# Altium PCB [BB]PowerSuppyandMotorDriver_REV1.0.PcbDoc
Units mm, origin at the board's own origin, x right, y up, seen from the top; angles counter-clockwise.
Board outline 293.07 x 144.6 mm, 2 copper layers (Top Layer, Bottom Layer); 93 components, 73 nets, 292 pads, 7 vias.
Unrouted connection lines stored in the file: 209.
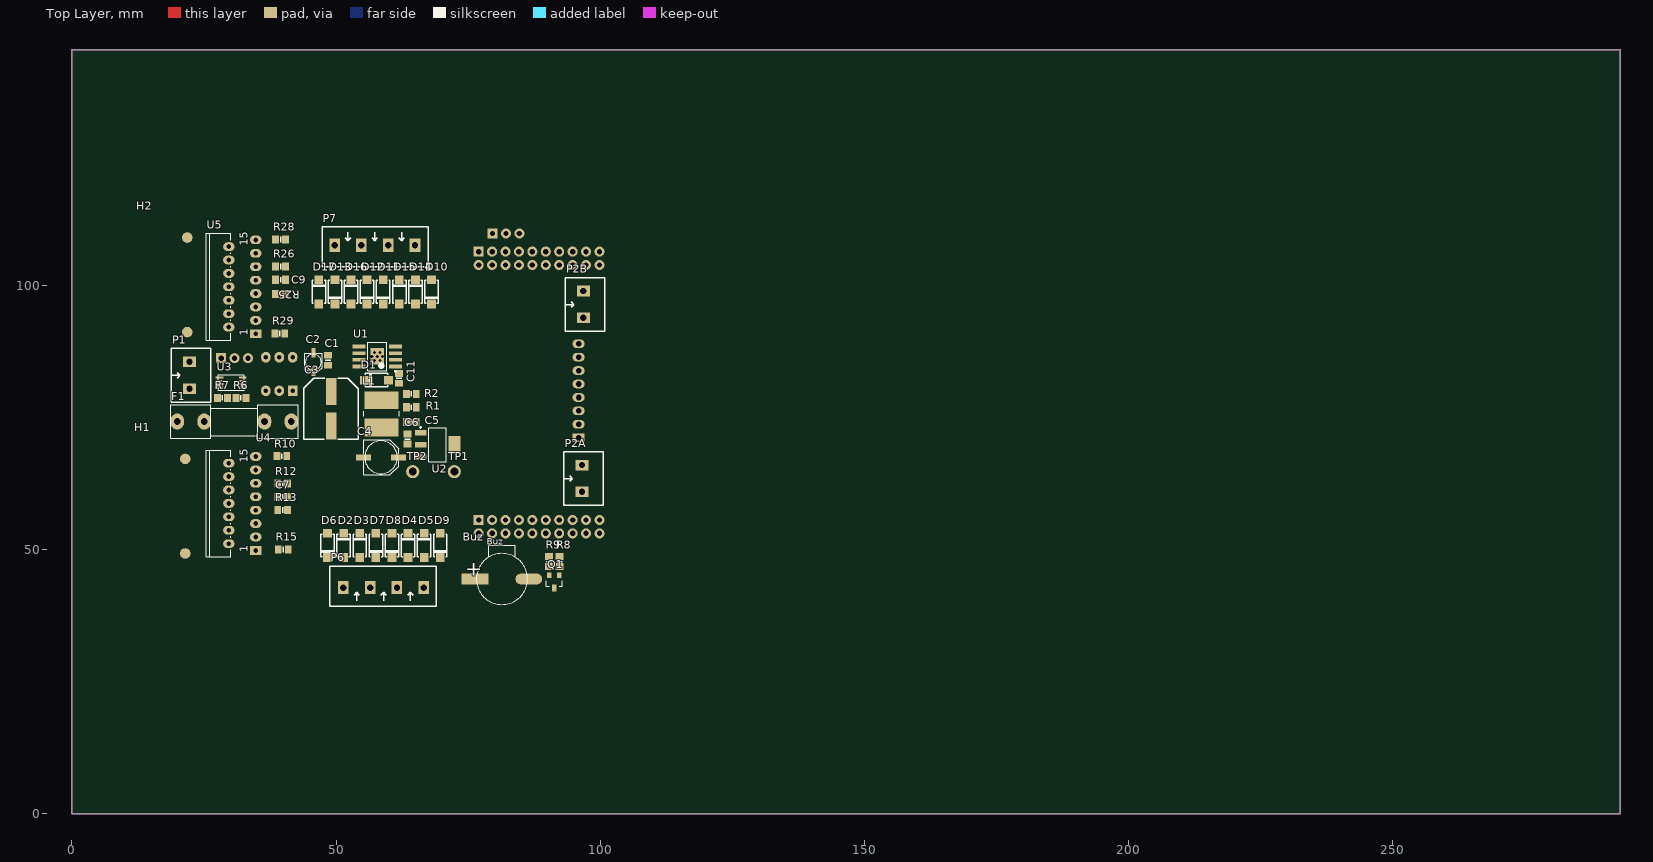
[diagram p0: Top Layer view]
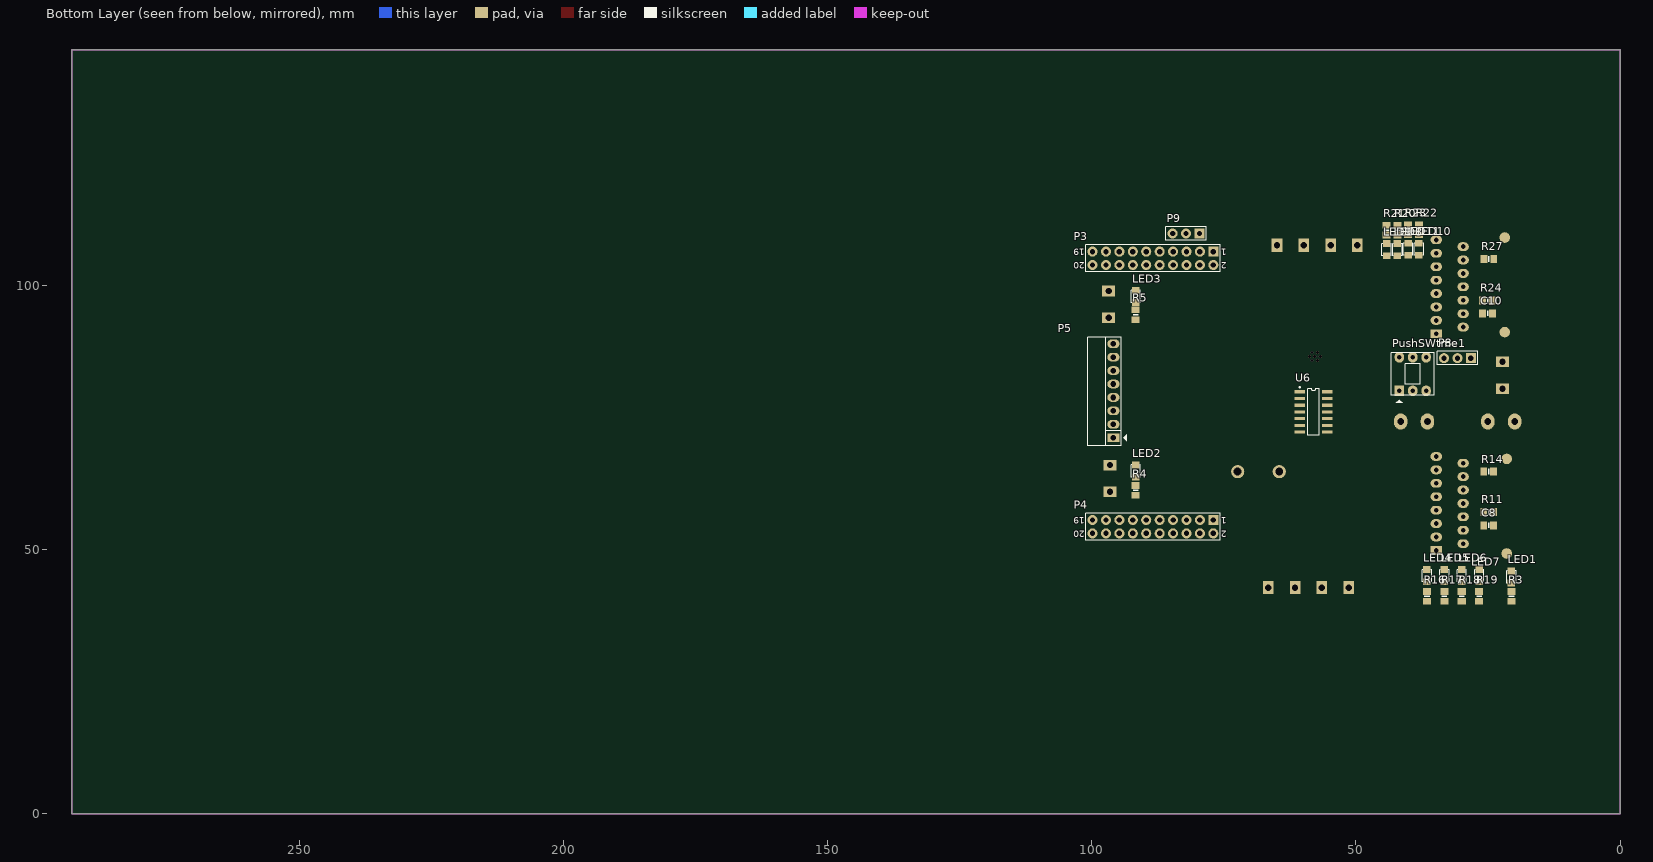
[diagram p1: Bottom Layer view, seen from below]

## Layer stack, top to bottom
Top Solder: solder mask 0.0102, Solder Resist, Dk 3.5
Top Layer: signal copper 0.0356
Dielectric 1: dielectric 0.32, FR-4, Dk 4.8
Bottom Layer: signal copper 0.0356
Bottom Solder: solder mask 0.0102, Solder Resist, Dk 3.5

## Board outline
0,0 293.065,0 293.065,144.602 0,144.602

## Design rules (kind name [scope] priority, off if disabled: settings)
Clearance [All] p1: gap=0.254
PolygonConnect [All] p1: connectstyle=Relief reliefconductorwidth=0.254 reliefentries=4 polygonreliefangle="90 Angle" airgapwidth=0.254
RoutingVias [All] p1: holewidth=0.711 width=1.27 viastyle="Through Hole" minholewidth=0.711 minwidth=1.27 maxholewidth=0.711 maxwidth=1.27
SolderMaskExpansion [All] p1: expansion=0.102
Width [All] p1: maxlimit=0.254 minlimit=0.254 preferedwidth=0.254
30 further rules are at their usual default settings.

## Components (designator, comment, footprint, x,y, rotation, side; value= is the part's Value field where it differs from the comment)
Buz "Buzzer" "BUZZER SMD" 78.867,44.45 r0 top
C1 "100nF-10%" C0805 48.463,85.852 r270 top
C2 "3.3µF" SM/C_ALU_SA 45.695,83.718 r90 top
C3 "330uF/35V" "Size G" 49.098,79.908 r270 top
C4 "220uF-6.3V" SM/C_ALU_SD8 61.824,67.488 r180 top
C5 "100nF-10%" C0805 64.262,74.168 r180 top
C6 "100nF-10%" C0805 63.525,70.942 r270 top
C7 "100nF-10%" C0805 39.878,59.944 r0 top
C8 "100nF-10%" C0805 24.892,54.61 r0 bottom
C9 "100nF-10%" C0805 39.497,101.092 r0 top
C10 "100nF-10%" C0805 25.095,94.742 r0 bottom
C11 "10nF-10%" C0805 61.9,82.423 r270 top
D1 "SS34" "DO-214AC (SMA)" 59.944,82.093 r180 top
D2 "SS34" "DO-214AC (SMA)" 51.435,48.514 r90 top
D3 "SS34" "DO-214AC (SMA)" 54.483,48.514 r90 top
D4 "SS34" "DO-214AC (SMA)" 63.627,48.514 r90 top
D5 "SS34" "DO-214AC (SMA)" 66.675,48.514 r90 top
D6 "SS14" "DO-214AC (SMA)" 48.387,53.086 r270 top
D7 "SS14" "DO-214AC (SMA)" 57.531,53.086 r270 top
D8 "SS14" "DO-214AC (SMA)" 60.579,53.086 r270 top
D9 "SS14" "DO-214AC (SMA)" 69.723,53.086 r270 top
D10 "SS34" "DO-214AC (SMA)" 68.072,101.092 r270 top
D11 "SS34" "DO-214AC (SMA)" 58.928,101.092 r270 top
D12 "SS34" "DO-214AC (SMA)" 55.88,101.092 r270 top
D13 "SS34" "DO-214AC (SMA)" 49.784,101.092 r270 top
D14 "SS14" "DO-214AC (SMA)" 65.024,96.52 r90 top
D15 "SS14" "DO-214AC (SMA)" 61.976,96.52 r90 top
D16 "SS14" "DO-214AC (SMA)" 52.832,96.52 r90 top
D17 "SS14" "DO-214AC (SMA)" 46.736,96.52 r90 top
F1 "Fuse" FUSE 30.75,74.25 r0 top locked
H1 "Heatsink TO220" "HEATSINK TO-220" 21.463,49.276 r90 top locked
H2 "Heatsink TO220" "HEATSINK TO-220" 21.844,91.186 r90 top locked
L1 "10uH/2A" L6D38 58.572,75.717 r270 top
LED1 "LED SMD" SM-LED-0805-Blue 20.574,45.974 r270 bottom
LED2 "LED SMD" SM-LED-0805-Blue 91.694,66.04 r270 bottom
LED3 "LED SMD" SM-LED-0805-Blue 91.694,99.06 r270 bottom
LED4 "LED SMD" SM-LED-0805-Blue 36.576,46.228 r270 bottom
LED5 "LED SMD" SM-LED-0805-Blue 33.274,46.228 r270 bottom
LED6 "LED SMD" SM-LED-0805-Blue 29.972,46.228 r270 bottom
LED7 "LED SMD" SM-LED-0805-Blue 26.67,46.228 r270 bottom
LED8 "LED SMD" SM-LED-0805-Blue 42.164,105.664 r90 bottom
LED9 "LED SMD" SM-LED-0805-Blue 44.196,105.664 r90 bottom
LED10 "LED SMD" SM-LED-0805-Blue 38.1,105.715 r90 bottom
LED11 "LED SMD" SM-LED-0805-Blue 40.132,105.715 r90 bottom
P1 "Domino 2" "DOMINO 2- 5mm" 22.25,83 r90 top locked
P2A "Domino 2" "DOMINO 2- 5mm" 96.545,63.475 r90 top
P2B "Domino 2" "DOMINO 2- 5mm" 96.825,96.418 r90 top
P3 "Header 2X10" "Header 2X10" 77,106.42 r0 bottom locked
P4 "Header 2X10" "Header 2X10" 77,55.62 r0 bottom locked
P5 "Header 8H" JP8H 95.91,71.196 r90 bottom
P6 "Domino 4" "DOMINO 4 -5mm" 51.377,42.814 r0 top
P7 "Domino 4" "DOMINO 4 -5mm" 64.944,107.606 r180 top
P8 "Header 1X3" "Header 1X3" 28.25,86.25 r0 bottom
P9 "Header 1X3" "Header 1X3" 79.629,109.855 r0 bottom
PushSWtme1 "SW?" "PUSH SW" 39.25,83.25 r90 bottom locked
Q1 "NPN Transistor" SC-43-BCE 91.313,43.942 r180 top
R1 "10k-5%" R0805 64.262,76.962 r180 top
R2 "3.3k-5%" R0805 64.262,79.502 r180 top
R3 "1.5k-5%" R0805 20.574,41.148 r90 bottom
R4 "560k-5%" R0805 91.694,61.214 r90 bottom
R5 "220R-5%" R0805 91.694,94.488 r90 bottom
R6 "100k-5%" R0805 32,78.75 r0 top
R7 "12k-5%" R0805 28.5,78.75 r0 top
R8 "1k-5%" R0805 92.329,47.752 r270 top
R9 "1k-5%" R0805 90.297,47.752 r270 top
R10 "0.56R-1%" R0805 39.751,67.691 r180 top
R11 "100k-5%" R0805 24.892,57.15 r0 bottom
R12 "100k-5%" R0805 39.878,62.484 r180 top
R13 "100k-5%" R0805 39.878,57.531 r180 top
R14 "100k-5%" R0805 24.892,64.77 r0 bottom
R15 "0.56R-1%" R0805 40.005,50.038 r180 top
R16 "560k-5%" R0805 36.576,41.148 r90 bottom
R17 "220R-5%" R0805 33.274,41.148 r90 bottom
R18 "1.5k-5%" R0805 29.972,41.148 r90 bottom
R19 "560k-5%" R0805 26.67,41.148 r90 bottom
R20 "220R-5%" R0805 42.164,110.49 r270 bottom
R21 "1.5k-5%" R0805 44.196,110.49 r270 bottom
R22 "560k-5%" R0805 38.1,110.541 r270 bottom
R23 "220R-5%" R0805 40.132,110.541 r270 bottom
R24 "100k-5%" R0805 25.095,97.155 r0 bottom
R25 "100k-5%" R0805 39.497,98.425 r180 top
R26 "100k-5%" R0805 39.497,103.632 r180 top
R27 "100k-5%" R0805 24.841,105.029 r0 bottom
R28 "0.56R-1%" R0805 39.497,108.712 r180 top
R29 "0.56R-1%" R0805 39.37,90.932 r180 top
TP1 "Test Point" "Hole 1.5mm" 72.39,64.77 r0 top
TP2 "Test Point" "Hole 1.5mm" 64.516,64.77 r0 top
U1 "TPS54xx" "SOIC-8 POWERPAD" 57.785,86.589 r180 top
U2 "LM1117-3.3V" SOT223-4N 69.215,69.85 r270 top
U3 "LMV358IDGKR" MSOP-8 30.25,81.75 r270 top
U4 "L298" DIP15SL2 32.25,58.75 r90 top locked
U5 "L298" DIP15SL2 32.25,99.75 r90 top locked
U6 "7400" SO14-150mil 58.039,76.073 r270 bottom

## Footprints (in the part's own frame and the unit in brackets; to place one, negate y for a bottom-side part, rotate by r counter-clockwise, add the part's x,y. Pads: shape width x height; smd on the part's side, far side on the other; paste and mask are expansions set on the pad)
"BUZZER SMD" [mil]
  rect 200x80 smd: 1(-100,0)
  oval 200x80 smd: 2(300,0)
  silkscreen extent -90,-190 290,250
C0805 [mil]
  rect 50x60 smd: 1(-37,0) 2(37,0)
  silkscreen extent 0,-20 0,20, body extent -39,-24 39,25, height 24
DIP15SL2 [mil] "TO, Thru-Hole, Vertical, Heatsink Mounted; 15 Bent Staggered Leads; Pitch 1.27 mm"
  rect 65x85 hole 35.43: 1(-350,-100)
  oval 65x85 hole 35.43: 2(-300,100) 3(-250,-100) 4(-200,100) 5(-150,-100) 6(-100,100) 7(-50,-100) 8(0,100) 9(50,-100) 10(100,100) 11(150,-100) 12(200,100) 13(250,-100) 14(300,100) 15(350,-100)
  silkscreen extent -398,84 398,269, body extent -382,-110 390,247, height 895
"DO-214AC (SMA)" [mil]
  rect 65x65 smd: 1(0,0) 2(180,0)
  silkscreen extent 5,-50 175,50, body extent -12,-51 192,51, height 95
"DOMINO 2- 5mm" [mm]
  rect 2x2.5 hole 1.2: 1(-2.54,0) 2(2.54,0)
  silkscreen extent -5.08,-4.08 5.08,3.43, body extent -5,-4.07 5,3.43, height 10
"DOMINO 4 -5mm" [mm]
  rect 2x2.5 hole 1.2: 1(0,0) 2(5.08,0) 3(10.147,0) 4(15.215,0)
  silkscreen extent -2.54,-3.53 17.58,4.09, body extent -2.43,-3.46 17.57,4.04, height 10
FUSE [mil] "De Fuse"
  oval 100x120 hole 50: 1(-425,0) 1(-225,0) 2(225,0) 2(425,0)
  silkscreen extent -475,-125 475,125, body extent -460,-122 460,122, height 378
"Header 1X3" [mil] "Connector; Header; 3 Position"
  rect 75x75 hole 40: 1(0,0)
  round 75 hole 40: 2(100,0) 3(200,0)
  silkscreen extent -50,-50 250,50, body extent -50,-50 250,50, height 276
"Header 2X10" [mil] "Connector; Header; 10x2 Position"
  rect 75x75 hole 40: 1(0,0)
  round 75 hole 40: 2(0,100) 3(100,0) 4(100,100) 5(200,0) 6(200,100) 7(300,0) 8(300,100) 9(400,0) 10(400,100) 11(500,0) 12(500,100) 13(600,0) 14(600,100) 15(700,0) 16(700,100) 17(800,0) 18(800,100) 19(900,0) 20(900,100)
  silkscreen extent -50,-50 950,150, body extent -45,-55 950,150, height 59
"HEATSINK TO-220" [mm]
  round 2 all layers, no hole paste+1 mask+0.5: 0(0,0)
  round 2 all layers, no hole paste+0.5 mask+0.5: 1(17.9,0)
  body extent -2.65,-11.1 20.65,5.4, height 28.01
"Hole 1.5mm" [mm]
  round 2.5 hole 1.5: 0(0,0)
JP8H [mil]
  rect 65x90 hole 42: 1(0,0)
  oval 65x90 hole 42: 2(100,0) 3(200,0) 4(300,0) 5(400,0) 6(500,0) 7(600,0) 8(700,0)
  silkscreen extent -60,-100 750,190, body extent -46,-15 746,424, height 49
L6D38 [mm] "10uH/2A ±20% SMD 6.7x6.7x4mm Precision Wire Wound Inductor, 2-Leads, Body 6.55x6.55mm, IPC Low Density"
  rect 3.35x6.45 smd: 1(-2.575,0) 2(2.575,0)
  silkscreen extent -0.5,-3.35 0.5,3.35, body extent -3.35,-3.35 3.35,3.35, height 4
MSOP-8 [mm]
  rect 0.399x1.45 smd: 1(-0.857,-2.3) 2(-0.207,-2.3) 3(0.443,-2.3) 4(1.093,-2.3) 5(1.093,2.1) 6(0.443,2.1) 7(-0.207,2.1) 8(-0.857,2.1)
  silkscreen extent -1.35,-2.57 1.57,2.39, body extent -1.4,-2.6 1.6,2.4, height 1.01
"PUSH SW" [mil] "SW DTDP - 6Pin 260x300x300 mil"
  rect 80x70 hole 35: 1(-125,100)
  oval 80x70 hole 35: 2(-125,0) 3(-125,-100) 4(125,-100) 5(125,0) 6(125,100)
  silkscreen extent -215,-160 160,160, body extent -158,-159 156,155, height 532
R0805 [mil]
  rect 50x60 smd: 1(-37,0) 2(37,0)
  silkscreen extent 0,-20 0,20, body extent -39,-25 39,25, height 18
SC-43-BCE [mil]
  rect 34x40 smd: B(-37.5,-46.5) E(37.5,-46.5)
  rect 34x50 smd: C(0,46.5)
  silkscreen extent -60,-8 60,33, body extent -57,-52 57,58, height 41
"Size G" [mil]
  rect 200x80 smd: 1(0,0) 2(255.91,0)
  silkscreen extent -100,-205 355,200, body extent -100,-205 356,201, height 402
SM-LED-0805-Blue [mil]
  rect 50x55 smd: 1(0,0) 2(90,0)
  silkscreen extent 0,-35 90,35, body extent 5,-25 85,25, height 43
SM/C_ALU_SA [mil] "1uF -> 4.7uF"
  rect 70x30 smd: 1(0,0) 2(140,0)
  silkscreen extent 5,-65 135,65, body extent -1,-65 141,65, height 213
SM/C_ALU_SD8 [mil] "100uF -> 220uF"
  rect 110x45 smd: 1(0,0) 2(260,0)
  silkscreen extent 0,-130 260,130, body extent -8,-130 268,130, height 303
SO14-150mil [mm] "Small Outline; 14 Leads; Body Width 3.9 mm; Pitch 1.27 mm"
  rect 0.6x2 smd: 1(-3.81,-2.6) 2(-2.54,-2.6) 3(-1.27,-2.6) 4(0,-2.6) 5(1.27,-2.6) 6(2.54,-2.6) 7(3.81,-2.6) 8(3.81,2.6) 9(2.54,2.6) 10(1.27,2.6) 11(0,2.6) 12(-1.27,2.6) 13(-2.54,2.6) 14(-3.81,2.6)
  silkscreen extent -4.78,-2.72 4.38,1.1, body extent -4.32,-3 4.32,3.2, height 1.7
"SOIC-8 POWERPAD" [mm]
  rect 2.6x3.1 smd: 0(0,0)
  rect 2.5x0.7 smd: 1(-3.45,1.93) 2(-3.45,0.66) 3(-3.45,-0.61) 4(-3.45,-1.88) 5(3.45,-1.88) 6(3.45,-0.61) 7(3.45,0.66) 8(3.45,1.93)
  silkscreen extent -3.57,-2.67 1.8,2.96, body extent -3.05,-2.37 2.95,2.53, height 1.7
SOT223-4N [mm] "SOT223, 4-Leads, Body 6.5x3.5mm, Pitch 2.3mm, Lead Span 7mm, IPC Medium Density"
  rect 1x2.2 smd: 1(-2.3,-3.2) 2(0,-3.2) 3(2.3,-3.2)
  rect 3.3x2.2 smd: 4(0,3.2)
  silkscreen extent -3.42,-3.32 3.23,1.68, body extent -3.25,-3.43 3.25,3.46, height 1.72

## Part data
C1 C5 C6 C7 C8 C9 C10: library part 100nF-50V-C0805, "Non-Polarized Capacitor"
C2: library part 4.7uF-25V-Tantalum, "Tantalum Capacitor"
C3: library part C_ALU_330uF_35V, "CAP ALUM 330UF 20% 35V SMD"
C4: library part 220uF-6.3V-Tantalum, "Tantalum Capacitor"
C11: library part 10nF-50V-C0805, "Non-Polarized Capacitor"
D1 D2 D3 D4 D5 D6 D7 D8 D9 D10 D11 D12 D13 D14 D15 D16 D17: library part Diode_SS14, "DIODE SCHOTTKY 40V 1A DO214AC"
H1 H2: "Heatsink-231625W T?n nhi?t Nhôm ki?u TO-220 / Multiwatt, 23x16x25mm"
L1: library part L6D38-100M, "10uH/2A ±20% SMD 6.7x6.7x4mm Inductor"
LED1 LED2 LED3 LED4 LED5 LED6 LED7 LED8 LED9 LED10 LED11: library part LED-SMD-0805
P1 P2A P2B: "Domino, 2-Pin"
P3 P4: "Header, 10-Pin, Dual row"
P5: "Header, 8-Pin, Right Angle"
P6 P7: "Domino 4-Pin"
P8 P9: "Header, 3-Pin"
PushSWtme1: library part PushSWtme, "Push SW 8x8 mm latching ON/OFF"
R1: library part 10k-5%-R0805, "RES 10k OHM 1/8W 5% 0805 SMD"
R2: library part 3.3k-5%-R0805, "RES 3.3k OHM 1/8W 5% 0805 SMD"
R3 R18 R21: library part 1.5k-5%-R0805, "RES 1.5k OHM 1/8W 5% 0805 SMD"
R4 R16 R19 R22: library part 560k-5%-R0603, "RES 560k OHM 1/10W 5% 0603 SMD"
R5 R17 R20 R23: library part 220R-5%-R0805, "RES 220 OHM 1/8W 5% 0805 SMD"
R6 R11 R12 R13 R14 R24 R25 R26 R27: library part 100k-5%-R0805, "RES 100k OHM 1/8W 5% 0805 SMD"
R7: library part 12k-5%-R0805, "RES 12k OHM 1/8W 5% 0805 SMD"
R8 R9: library part 1k-5%-R0805, "RES 1k OHM 1/8W 5% 0805 SMD"
R10 R15 R28 R29: library part 0.56R-1%-R0603, "RES 0.56 OHM 1/10W 1% 0603 SMD"
U1: "IC REG BUCK ADJ 1A 8SOIC"
U2: "800mA Low-Dropout Linear Regulator"
U4 U5: "Dual Full-H Driver"
U6: "Quad 2-Input NAND Gate"

## Via types
v1: diameter 0.6, hole 0.6, Top Layer to Bottom Layer, 7 vias

## Nets (pads, with @x,y where several pads share a name; then routed paths per layer and width w, separated by ;. In a path a pad name is that pad's centre, name@x,y a point inside that pad or via, vN(x,y) a via of type N, cw(c..) or ccw(c..) an arc to the next point about the centre after c; other vN are vias at no path point)
3V: P4.5 P4.6
+3V3: C6.2 LED3.1 P2B.2 TP1.0 U2.2 U2.4
+24VDC: C1.2 C2.1 C3.1 PushSWtme1.2 PushSWtme1.5 U1.7
DIRCTLMOTORA: LED5.1 P4.13 P5.2 R13.2 U4.7 U6.1 U6.2
DIRCTLMOTORB: LED7.1 P4.20 P5.4 R14.2 U4.12 U6.4 U6.5
DIRCTLMOTORC: LED9.1 P3.12 P5.6 R25.2 U5.7 U6.12 U6.13
DIRCTLMOTORD: LED11.1 P3.11 P5.8 R27.2 U5.12 U6.9 U6.10
GND: C1.1 C2.2 C3.2 C4.2 C5.1 C6.1 C7.2 C8.1 C9.2 C10.1 D1.1 D6.1 D7.1 D8.1 D9.1 D14.1 D15.1 D16.1 D17.1 P1.1 P2A.1 P2B.1 P3.1 P3.2 P3.5 P4.1 P4.2 P8.2 P9.2 R2.1 R3.1 R4.1 R5.1 R7.1 R9.1 R10.1 R11.1 R12.1 R13.1 R14.1 R15.1 R16.1 R17.1 R18.1 R19.1 R20.1 R21.1 R22.1 R23.1 R24.1 R25.1 R26.1 R27.1 R28.1 R29.1 U1.0 U1.6 U2.1 U3.4 U3.5 U3.6 U4.8 U5.8 U6.7
  other v1: 57.277,85.827 58.293,85.827 56.769,86.589 57.785,86.589 58.801,86.589 57.277,87.351 58.293,87.351
NetBuz_2: Buz.2 Q1.C
NetC11_1: C11.1 U1.1
NetC11_2: C11.2 D1.2 L1.1 U1.8
NetD2_1: D2.1 D6.2 P6.1 U4.2
NetD3_1: D3.1 D7.2 P6.2 U4.3
NetD4_1: D4.1 D8.2 P6.3 U4.13
NetD5_1: D5.1 D9.2 P6.4 U4.14
NetD10_1: D10.1 D14.2 P7.1 U5.2
NetD11_1: D11.1 D15.2 P7.2 U5.3
NetD12_1: D12.1 D16.2 P7.3 U5.13
NetD13_1: D13.1 D17.2 P7.4 U5.14
NetF1_1: F1.1 P1.2
NetLED1_2: LED1.2 R3.2
NetLED2_2: LED2.2 R4.2
NetLED3_2: LED3.2 R5.2
NetLED4_2: LED4.2 R16.2
NetLED5_2: LED5.2 R17.2
NetLED6_2: LED6.2 R18.2
NetLED7_2: LED7.2 R19.2
NetLED8_2: LED8.2 R20.2
NetLED9_2: LED9.2 R21.2
NetLED10_2: LED10.2 R22.2
NetLED11_2: LED11.2 R23.2
NetP8_1: P8.1 U3.8
NetP8_3: P8.3 U3.1 U3.2
NetQ1_B: Q1.B R8.2
NetQ1_E: Q1.E R9.2
NetR1_1: R1.1 R2.2 U1.4
NetR6_1: R6.1 R7.2 U3.3
NetR10_2: R10.2 U4.15
NetR15_2: R15.2 U4.1
NetR28_2: R28.2 U5.15
NetR29_2: R29.2 U5.1
NetU4_5: U4.5 U6.3
NetU4_10: U4.10 U6.6
NetU5_5: U5.5 U6.11
NetU5_10: U5.10 U6.8
NRST: P3.6
PA4: P3.16
PA5: P3.15
PA6: P3.18
PA7: P3.17
PC0: P3.8
PC1: P3.7
PC3: P3.9
PC4: P3.20
PC5: P3.19
PC13: P4.12
PC14: P4.9
PC15: P4.10
PE0: P4.17
PE1: P4.18
PE2: P4.15
PE3: P4.16
PH0: P4.7
PH1: P4.8
PWMBUZZER: P4.14 R8.1
READBATRVOLT: P3.10 P9.3
SPEEDCTLMOTORA: LED4.1 P4.11 P5.1 R11.2 U4.6
SPEEDCTLMOTORB: LED6.1 P4.19 P5.3 R12.2 U4.11
SPEEDCTLMOTORC: LED8.1 P3.14 P5.5 R24.2 U5.6
SPEEDCTLMOTORD: LED10.1 P3.13 P5.7 R26.2 U5.11
VCC: Buz.1 C4.1 C5.2 C7.1 C9.1 L1.2 LED2.1 P2A.2 P4.3 P4.4 R1.2 TP2.0 U2.3 U4.9 U5.9 U6.14
VDD: P3.3 P3.4 P9.1
VIN: C8.2 C10.2 D2.2 D3.2 D4.2 D5.2 D10.2 D11.2 D12.2 D13.2 F1.2 LED1.1 PushSWtme1.1 PushSWtme1.4 R6.2 U4.4 U5.4
pads on no net: H1.0 H1.1 H2.0 H2.1 PushSWtme1.3 PushSWtme1.6 U1.2 U1.3 U1.5 U3.7

## Keep-outs
Keep-Out Layer:
  the board outline again, w0.254

## Text inside footprints (layer, text, board x,y; h text height)
Buz: Top Overlay "+" at 74.422,45.085 h2.86
P3: Bottom Overlay "2" at 74.46,104.388 h1.27 r180; Bottom Overlay "1" at 74.46,106.928 h1.27 r180; Bottom Overlay "19" at 101.384,106.928 h1.27 r180; Bottom Overlay "20" at 101.384,104.388 h1.27 r180
P4: Bottom Overlay "2" at 74.46,53.588 h1.27 r180; Bottom Overlay "1" at 74.46,56.128 h1.27 r180; Bottom Overlay "19" at 101.384,56.128 h1.27 r180; Bottom Overlay "20" at 101.384,53.588 h1.27 r180
U4: Top Overlay "15" at 33.266,66.497 h1.5 r90; Top Overlay "1" at 33.266,49.479 h1.5 r90
U5: Top Overlay "15" at 33.266,107.497 h1.5 r90; Top Overlay "1" at 33.266,90.479 h1.5 r90